# Altium PCB BH1730FVC_panel_PCB.PcbDoc
Units mm, origin at the board's own origin, x right, y up, seen from the top; angles counter-clockwise.
Board outline 5 x 20 mm, 2 copper layers (Top Layer, Bottom Layer), stack 1.571 mm thick; 8 components, 11 nets, 36 pads, 11 vias.
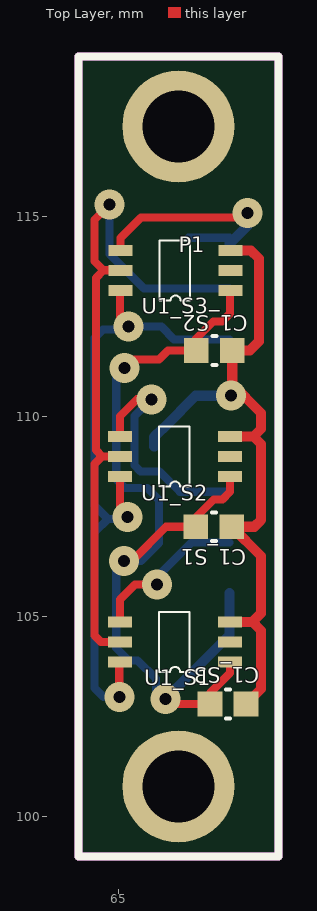
[diagram p0: Top Layer view]
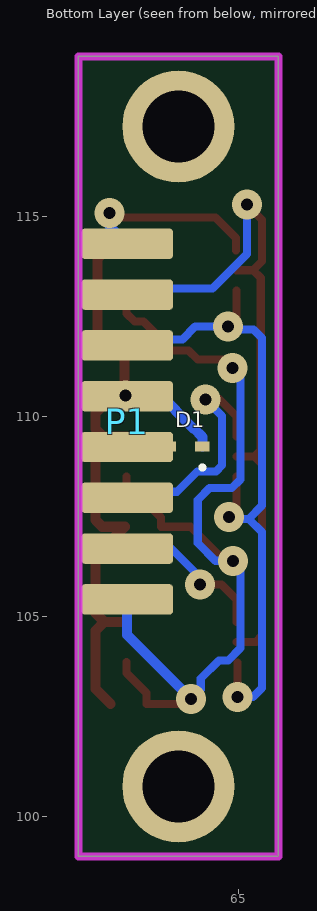
[diagram p1: Bottom Layer view, seen from below]

## Layer stack, top to bottom
Top Solder: solder mask 0.0102, Solder Resist, Dk 3.5
Top Layer: signal copper 0.0356
Dielectric 1: dielectric 1.5, FR-4, Dk 4.8
Bottom Layer: signal copper 0.0356
Bottom Solder: solder mask 0.0102, Solder Resist, Dk 3.5

## Board outline
64,119 69,119 69,99 64,99

## Design rules (kind name [scope] priority, off if disabled: settings)
Clearance [(OnLayer('Bottom Layer') OR OnLayer('Top Layer'))] p1: gap=0.203
PolygonConnect [All] p1: connectstyle=Relief reliefconductorwidth=0.254 reliefentries=4 polygonreliefangle="90 Angle" airgapwidth=0.254
RoutingVias [All] p1: holewidth=0.305 width=0.711 viastyle="Through Hole" minholewidth=0.305 minwidth=0.711 maxholewidth=0.305 maxwidth=0.711
SolderMaskExpansion [All] p1: expansion=0.102
Width [All] p1: maxlimit=2.54 minlimit=0.203 preferedwidth=0.254 checkconnectedcopper=TRUE
30 further rules are at their usual default settings.

## Classes and differential pairs
component class S1: C1_S1 U1_S1
component class S2: C1_S2 U1_S2
component class S3: C1_S3 U1_S3
channel class sensor: S1 S2 S3
component class main: D1 P1
net class SDA[1..3]: SDA1 SDA2 SDA3

## Components (designator, comment, footprint, x,y, rotation, side; value= is the part's Value field where it differs from the comment)
C1_S1 "0402" SMD_Capacitor_0402 67.386,107.239 r180 top (schematic designator C1)
C1_S2 "0402" SMD_Capacitor_0402 67.399,111.646 r180 top (schematic designator C1)
C1_S3 "0402" SMD_Capacitor_0402 67.742,102.806 r180 top (schematic designator C1)
D1 "B20DA579" ONSC-SOD-923-2-514AA-01_V 66.319,109.245 r0 bottom
P1 "Header 8" "header 8" 67.78,105.423 r90 top
U1_S1 "BH1730FVC" WSOF6 67.793,103.861 r180 top (schematic designator U1)
U1_S2 "BH1730FVC" WSOF6 67.793,108.496 r180 top (schematic designator U1)
U1_S3 "BH1730FVC" WSOF6 67.805,113.144 r180 top (schematic designator U1)

## Footprints (in the part's own frame and the unit in brackets; to place one, negate y for a bottom-side part, rotate by r counter-clockwise, add the part's x,y. Pads: shape width x height; smd on the part's side, far side on the other; paste and mask are expansions set on the pad)
"header 8" [mm] "1.27 mm pitch"
  rrect25% 0.76x2.3 smd far side: 1(0,0) 2(1.27,0) 3(2.54,0) 4(3.81,0) 5(5.08,0) 6(6.35,0) 7(7.62,0) 8(8.89,0)
ONSC-SOD-923-2-514AA-01_V [mm] "SOD, 2-Leads, Body 0.8x0.6mm"
  rect 0.36x0.25 smd: 1(-0.42,0) 2(0.42,0)
  silkscreen extent -0.47,0.48 -0.37,0.57, body extent -0.4,-0.3 0.4,0.3, height 0.43
SMD_Capacitor_0402 [mm] "SMD Capacitor, Inch 0402, Metric 1005."
  rect 0.62x0.62 smd: 1(-0.45,0) 2(0.45,0)
  silkscreen extent -0.05,-0.36 0.05,0.36, body extent -0.5,-0.3 0.5,0.3, height 0.2
WSOF6 [mm]
  rect 0.6x0.27 smd: 1(0,0) 2(0,-0.5) 3(0,-1) 4(2.75,-1) 5(2.75,-0.5) 6(2.75,0)
  silkscreen extent 1.02,-1.25 1.78,0.25, body extent 0,-1.4 2.75,0.38, height 0.75

## Part data
C1_S1 C1_S2 C1_S3: library part Cap, "Capacitor"
D1: library part BAS16P2T5G, "Switching Diode, 2-Pin SOD-923, Pb-Free, Tape and Reel"
P1: "Header, 8-Pin"
U1_S1 U1_S2 U1_S3: "Digital 16bit Serial Output Type  Ambient Light Sensor IC"

## Free pads (board coordinates)
  round 2.8 hole 1.8: 0(66.5,100.749) 0(66.5,117.245)

## Via types
v1: diameter 0.75, hole 0.3, Top Layer to Bottom Layer, tented both sides, 10 vias
v2: diameter 0.75, hole 0.3, Top Layer to Bottom Layer, tented top, 1 vias

## Nets (pads, with @x,y where several pads share a name; then routed paths per layer and width w, separated by ;. In a path a pad name is that pad's centre, name@x,y a point inside that pad or via, vN(x,y) a via of type N, cw(c..) or ccw(c..) an arc to the next point about the centre after c; other vN are vias at no path point)
3.3-DIG: C1_S1.2 C1_S2.2 C1_S3.2 P1.1 U1_S1.1 U1_S2.1 U1_S3.1 | length 24
  Top Layer w0.203: v1(65.138,106.388) 65.341,106.388 66.192,107.239 C1_S1.2 66.936,107.475 67.386,107.925 67.602,107.925 67.793,108.115 U1_S2.1 ; v1(65.151,111.214) 65.354,111.417 66.015,111.417 66.243,111.646 C1_S2.2 66.949,111.945 67.373,112.37 67.589,112.37 67.793,112.573 U1_S3.1@67.793,113.144 ; v1@66.18,102.806 C1_S3.2 67.292,103.08 67.793,103.581 U1_S1.1
  Bottom Layer w0.203: v1(65.151,111.214) 64.948,111.011 64.948,108.42 65.164,108.204 65.722,108.204 66.015,107.912 66.015,106.832 65.57,106.388 v1(65.138,106.388) 64.948,106.197 64.948,104.203 65.253,103.899 65.481,103.899 65.938,103.441 65.938,103.175 v1(66.18,102.933)
  Bottom Layer w0.254: v1(66.18,102.933) 67.78,104.534 P1.1@67.78,105.575
DIO: D1.2 P1.4
DVI: P1.7 U1_S1.5 U1_S2.5 U1_S3.5 | length 17.4
  Top Layer w0.203: v1(64.783,115.291) 64.406,114.914 64.406,113.876 64.63,113.652 ; U1_S1.5 64.562,104.361 64.406,104.516 64.406,108.806 64.597,108.996 ; U1_S2.5 64.597,108.996 ; U1_S3.5@65.043,113.652 64.63,113.652 ; 64.597,108.996 64.438,109.155 64.438,113.46 64.63,113.652
  Bottom Layer w0.203: v1(64.783,115.291) 64.783,114.059 65.646,113.195 P1.7@67.78,113.195
GND-DIG: C1_S1.1 C1_S2.1 C1_S3.1 D1.1 P1.5 U1_S1.3 U1_S2.3 U1_S3.3 | length 17.9
  Top Layer w0.254: U1_S1.3 68.355,104.861 ; U1_S2.3 68.38,109.496 ; U1_S3.3@67.793,114.148 68.313,114.148 68.516,113.944 68.516,111.874 68.288,111.646 C1_S2.1 67.849,110.802 68.568,110.083 68.568,109.684 68.38,109.496 ; C1_S3.1 68.568,103.183 68.568,104.647 68.355,104.861 ; 68.355,104.861 68.568,105.074 68.568,106.507 C1_S1.1 68.402,107.239 68.568,107.405 68.568,109.308 68.38,109.496
  Bottom Layer w0.254: D1.1 65.899,109.486 66.11,109.696 66.127,109.696 66.554,110.124 66.554,110.141 66.929,110.515 v2(67.818,110.515)
NetU1_S1_2: U1_S1.2
NetU1_S2_2: U1_S2.2
NetU1_S3_2: U1_S3.2
SCL: P1.6 U1_S1.6 U1_S2.6 U1_S3.6 | length 16.7
  Top Layer w0.203: v1(65.024,102.984) U1_S1.6@65.024,103.842 ; U1_S2.6 65.043,107.665 v1(65.227,107.48) ; U1_S3.6@65.043,113.144 65.043,112.453 v1(65.253,112.243)
  Bottom Layer w0.203: v1(65.024,102.984) 64.63,102.984 64.406,103.208 64.406,107.104 64.738,107.436 ; v1@65.183,107.436 64.738,107.436 ; v1@65.253,112.166 64.618,112.166 64.406,111.955 64.406,107.768 64.738,107.436 ; v1(65.253,112.243) 66.078,112.243 66.396,111.925 P1.6@67.78,111.925
SDA1: P1.2 U1_S1.4 | length 4
  Top Layer w0.203: U1_S1.4 65.043,105.416 65.418,105.791 v1(65.964,105.791)
  Bottom Layer w0.203: v1(65.964,105.791) 65.964,105.981 66.827,106.845 P1.2@67.78,106.845
SDA2: P1.3 U1_S2.4 | length 5.9
  Top Layer w0.203: U1_S2.4 65.043,110.001 65.468,110.426 v1(65.824,110.426)
  Bottom Layer w0.203: v1(65.824,110.426) 65.405,110.007 65.405,108.775 65.557,108.623 66.027,108.623 66.535,108.115 P1.3@67.78,108.115
SDA3: P1.8 U1_S3.4 | length 5.7
  Top Layer w0.203: U1_S3.4 65.055,114.458 65.57,114.973 v1@68.224,114.973
  Bottom Layer w0.203: P1.8@66.751,114.465 P1.8@67.78,114.465
  Bottom Layer w0.254: P1.8 68.224,114.757 v1(68.224,115.087)

## Keep-outs
Keep-Out Layer:
  the board outline again, w0.203

## Silkscreen, mask and mechanical layers (free items; w line width, h text height)
Top Overlay:
  the board outline again, w0.203
Mechanical 1:
  the board outline again, w0.203

## Dimensions
66.5,100.749 to 64,99 on Drill Guide
64,119 to 66.5,117.245 on Drill Guide
64,99 to 69,99 on Drill Guide